# Altium PCB PCB1.PcbDoc
Units mil, origin at the board's own origin, x right, y up, seen from the top; angles counter-clockwise.
Board outline 1574.8 x 1574.8 mil, 2 copper layers (Top Layer, Bottom Layer), stack 38.189 mil thick; 44 components, 35 nets, 170 pads, 9 vias.
Unrouted connection lines stored in the file: 112.
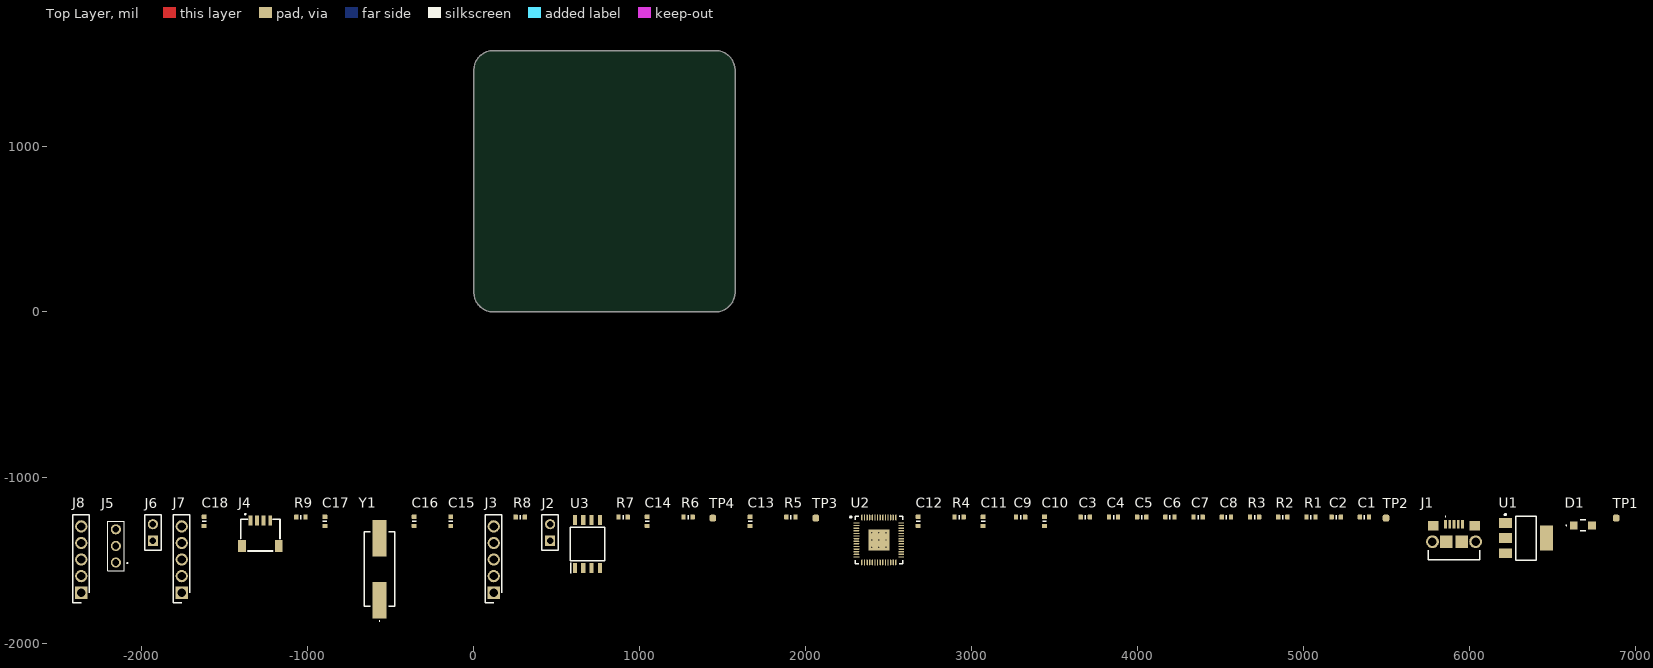
[diagram p0: Top Layer view]
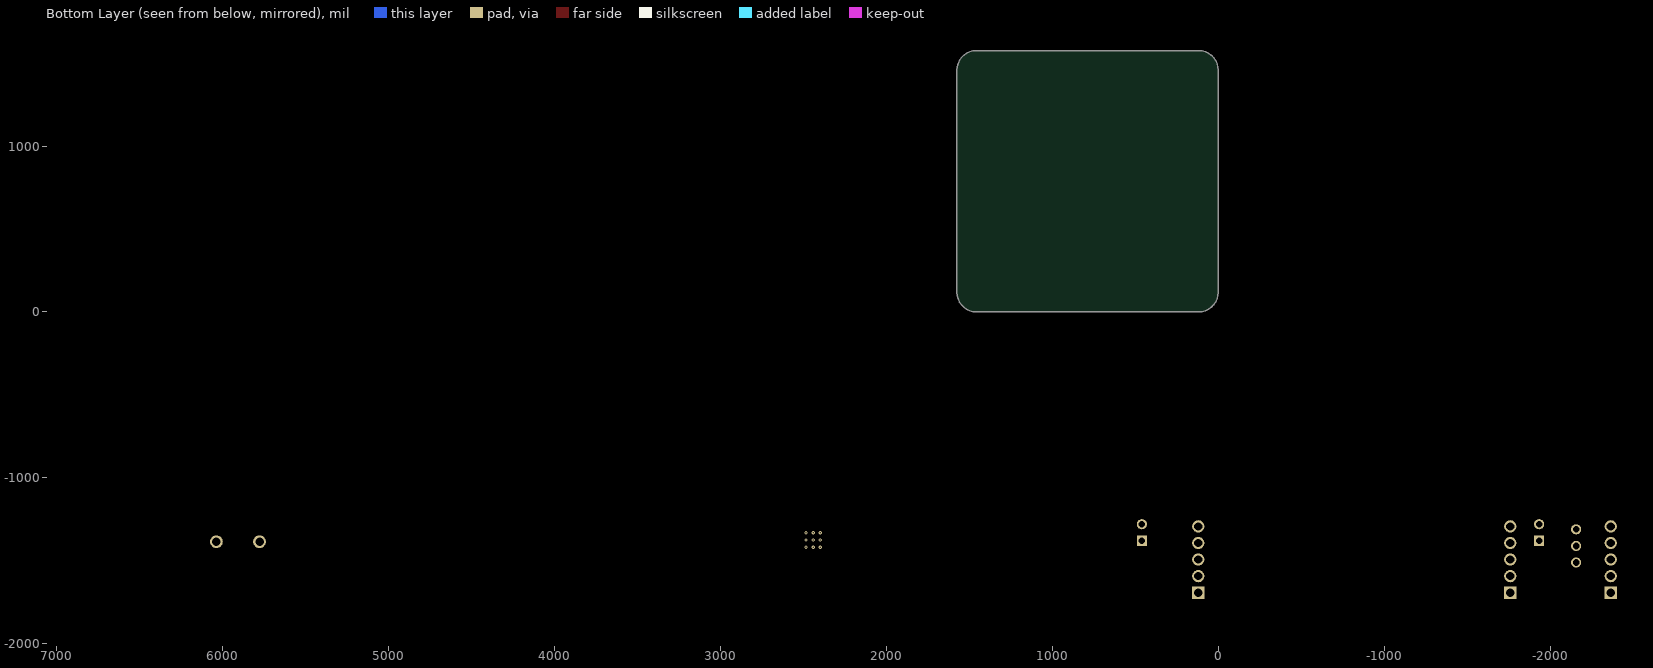
[diagram p1: Bottom Layer view, seen from below]

## Layer stack, top to bottom
Top Solder: solder mask 0.5, Solder Resist, Dk 3.8
Top Layer: signal copper 1.378
Dielectric1: core 35.433, FR-4, Dk 4.5
Bottom Layer: signal copper 1.378
Bottom Solder: solder mask 0.5, Solder Resist, Dk 3.8

## Board outline
119.11,0.6 1457.69,0.6 1478.2,2.39 1498.09,7.72 1516.75,16.42 1533.61,28.23 1548.17,42.79 1559.98,59.65 1568.68,78.31 1574.01,98.2 1575.8,118.71 1575.8,1457.29 1574.01,1477.8 1568.68,1497.69 1559.98,1516.35 1548.17,1533.21 1533.61,1547.77 1516.75,1559.58 1498.09,1568.28 1478.2,1573.61 1457.69,1575.4 119.11,1575.4 98.6,1573.61 78.71,1568.28 60.05,1559.58 43.19,1547.77 28.63,1533.21 16.82,1516.35 8.12,1497.69 2.79,1477.8 1,1457.29 1,118.71 2.79,98.2 8.12,78.31 16.82,59.65 28.63,42.79 43.19,28.23 60.05,16.42 78.71,7.72 98.6,2.39

## Design rules (kind name [scope] priority, off if disabled: settings)
Clearance Clearance_1 [OnMid vs OnMid] p1: gap=10 ignorepadtopadclearanceinfootprint=FALSE except(5: Arc-Arc Arc-Track Arc-Text Track-Track Track-Text SMDPad-SMDPad Text-Text; 12: Arc-SMDPad Track-SMDPad SMDPad-Text; 15: Arc-THPad Track-THPad SMDPad-THPad THPad-Text; 20: THPad-THPad) sourcerule=44 cellrowname=All cellrowtype=0 cellcolname=All cellcoltype=0 innerlayers=TRUE
Clearance Clearance_2 [(ExistsOnLayer('Top Layer') Or ExistsOnLayer('Bottom Layer')) vs (ExistsOnLayer('Top Layer') Or ExistsOnLayer('Bottom Layer'))] p2: gap=10 ignorepadtopadclearanceinfootprint=FALSE except(5: Arc-Arc Arc-Track Arc-Text Track-Track Track-Text SMDPad-SMDPad Text-Text; 12: Arc-SMDPad Track-SMDPad SMDPad-Text; 15: Arc-THPad Track-THPad SMDPad-THPad THPad-Text; 20: THPad-THPad) sourcerule=44 cellrowname=All cellrowtype=0 cellcolname=All cellcoltype=0 outerlayers=TRUE
Clearance [All] p3: gap=10 ignorepadtopadclearanceinfootprint=FALSE ismatrix=TRUE
DiffPairsRouting DifferentialPairsRouting_2 [InDifferentialPairClass('USB2.0')] p1: maxlimit=5 minlimit=5 mostfreqgap=5 toplayer_minwidth=16.75 toplayer_maxwidth=16.75 toplayer_prefwidth=16.75 bottomlayer_minwidth=16.75 bottomlayer_maxwidth=16.75 bottomlayer_prefwidth=16.75 impedanceprofiledriven=TRUE impedanceprofileid={EA6087F4-5ED0-4EBA-825E-8C07D515F3D2} impedanceprofilevalue=90.000000 maxuncoupledlength=500
DiffPairsRouting DifferentialPairsRouting_1 [InDifferentialPairClass('All Differential Pairs')] p2: maxlimit=10 minlimit=5 mostfreqgap=5 toplayer_minwidth=5 toplayer_maxwidth=20 toplayer_prefwidth=15 bottomlayer_minwidth=5 bottomlayer_maxwidth=20 bottomlayer_prefwidth=15 maxuncoupledlength=500
DiffPairsRouting [All] p3: maxlimit=10 minlimit=5 mostfreqgap=5 toplayer_minwidth=5 toplayer_maxwidth=20 toplayer_prefwidth=15 bottomlayer_minwidth=5 bottomlayer_maxwidth=20 bottomlayer_prefwidth=15 maxuncoupledlength=500
HoleSize [All] p1: absolutevalues=TRUE maxlimit=248 minlimit=12 maxpercent=80.000 minpercent=20.000
HoleToHoleClearance [All] p1: gap=20 allowstackedmicrovias=TRUE
MinimumAnnularRing [All] p1: minimumring=12
PasteMaskExpansion [All] p1: expansion=10
PlaneClearance [All] p1: clearance=15
PlaneConnect [All] p1: pad.planeconnectstyle=Relief pad.reliefexpansion=20 pad.reliefentries=4 pad.reliefconductorwidth=10 pad.reliefairgap=10 via.planeconnectstyle=Direct via.reliefexpansion=20 via.reliefentries=4 via.reliefconductorwidth=10 via.reliefairgap=10
PolygonConnect [All] p1: connectstyle=Relief reliefconductorwidth=10 reliefentries=4 polygonreliefangle="90 Angle" conductorbypadedge=TRUE mindistance=15 enablemindistance=FALSE airgapwidth=10
RoomDefinition TOP [InComponentClass('TOP')] p1: confinementstyle=ConfineIn formatcopy=TRUE lockcomponents=FALSE outline -2433,-1894 7021,-1894 7021,-1106 -2433,-1106
RoutingVias RoutingViaStyle_1 [All] p1: holewidth=28 width=50 viastyle="Through Hole" minholewidth=28 minwidth=50 maxholewidth=28 maxwidth=50
RoutingVias [All] p2: holewidth=10 width=20 viastyle="Through Hole" minholewidth=10 minwidth=20 maxholewidth=10 maxwidth=20
SMDNeckDown [All] p1: percent=100.000
SilkToSolderMaskClearance SilkscreenOverComponentPads [IsPad] p1: minsilkscreentomaskgap=10 clearancetoexposedcopper=TRUE
SolderMaskExpansion [All] p1: expansion=10 istentingtop=FALSE
Width MaxMinWidth_1 [InNetClass('REG-PWR')] p1: maxlimit=20 minlimit=10 preferedwidth=10 minimp=50.000000 maximp=50.000000 favimp=50.000000
Width MaxMinWidth_2 [InNetClass('UNREG-PWR')] p2: maxlimit=20 minlimit=10 preferedwidth=10 minimp=50.000000 maximp=50.000000 favimp=50.000000
Width [All] p3: maxlimit=20 minlimit=5 preferedwidth=6 minimp=50.000000 maximp=50.000000 favimp=50.000000
23 further rules are at their usual default settings.

## Classes and differential pairs
net class UNREG-PWR: VBUS VSYS
net class REG-PWR: 1V1_REG 3V3_REG
differential pair class USB2.0: D_USB-D
differential pair D_USB-D: +USB-D_P -USB-D_N

## Components (designator, comment, footprint, x,y, rotation, side; value= is the part's Value field where it differs from the comment)
C1 "Capacitor 10µF +/-20% 10V 0603" CAPC0603(1608)100_L 5368,-1236 r0 top value=10µF
C2 "Capacitor 10µF +/-20% 10V 0603" CAPC0603(1608)100_L 5198,-1236 r0 top value=10µF
C3 "Capacitor 10µF +/-20% 10V 0603" CAPC0603(1608)100_L 3686,-1236 r0 top value=100nF
C4 "Capacitor 10µF +/-20% 10V 0603" CAPC0603(1608)100_L 3856,-1236 r0 top value=100nF
C5 "Capacitor 10µF +/-20% 10V 0603" CAPC0603(1608)100_L 4026,-1236 r0 top value=100nF
C6 "Capacitor 10µF +/-20% 10V 0603" CAPC0603(1608)100_L 4196,-1236 r0 top value=100nF
C7 "Capacitor 10µF +/-20% 10V 0603" CAPC0603(1608)100_L 4366,-1236 r0 top value=100nF
C8 "Capacitor 10µF +/-20% 10V 0603" CAPC0603(1608)100_L 4536,-1236 r0 top value=100nF
C9 "Capacitor 10µF +/-20% 10V 0603" CAPC0603(1608)100_L 3296,-1236 r0 top value=100nF
C10 "Capacitor 10µF +/-20% 10V 0603" CAPC0603(1608)100_L 3440,-1262 r90 top value=100nF
C11 "Capacitor 10µF +/-20% 10V 0603" CAPC0603(1608)100_L 3070,-1262 r90 top value=1uF
C12 "Capacitor 10µF +/-20% 10V 0603" CAPC0603(1608)100_L 2679,-1262 r90 top value=1uF
C13 "Capacitor 10µF +/-20% 10V 0603" CAPC0603(1608)100_L 1666,-1262 r90 top value=1uF
C14 "Capacitor 10µF +/-20% 10V 0603" CAPC0603(1608)100_L 1046,-1262 r90 top value=100nF
C15 "Capacitor 10µF +/-20% 10V 0603" CAPC0603(1608)100_L -138,-1262 r90 top value=100µF
C16 "Capacitor 10µF +/-20% 10V 0603" CAPC0603(1608)100_L -358,-1262 r90 top value=30pF
C17 "Capacitor 10µF +/-20% 10V 0603" CAPC0603(1608)100_L -896,-1262 r90 top value=30pF
C18 "Capacitor 10µF +/-20% 10V 0603" CAPC0603(1608)100_L -1624,-1262 r90 top value=100µF
D1 "PMEG2010ER,115" PMEG2010ER115 6685,-1286 r0 top
J1 "10118193-0001LF" 101181930001LF 5908,-1373 r0 top
J2 "TSW-102-26-G-S" SMTC-TSW-102-26-XX-S 461,-1379 r90 top
J3 "2212S-05SG-85" RHDR5W74P0X254_1X5_1320X250X850P 121,-1692 r90 top
J4 "SM04B-SRSS-TB_LF__SN_" SM04B-SRSS-TB(LFSN) -1403,-1441 r0 top
J5 "TSW-103-26-G-S" TSW-103-XX-YY-S -2156,-1510 r90 top
J6 "TSW-102-26-G-S" SMTC-TSW-102-26-XX-S -1933,-1379 r90 top
J7 "2212S-05SG-85" RHDR5W74P0X254_1X5_1320X250X850P -1759,-1692 r90 top
J8 "2212S-05SG-85" RHDR5W74P0X254_1X5_1320X250X850P -2365,-1692 r90 top
R1 "Resistor 120R +/-5 % 0603 0.1 W" RESC0603(1608)_L 5046,-1236 r0 top value=180R
R2 "Resistor 120R +/-5 % 0603 0.1 W" RESC0603(1608)_L 4876,-1236 r0 top value=300R
R3 "Resistor 120R +/-5 % 0603 0.1 W" RESC0603(1608)_L 4706,-1236 r0 top value=200R
R4 "Resistor 120R +/-5 % 0603 0.1 W" RESC0603(1608)_L 2925,-1236 r0 top value=1R
R5 "Resistor 120R +/-5 % 0603 0.1 W" RESC0603(1608)_L 1912,-1236 r0 top value=27R
R6 "Resistor 120R +/-5 % 0603 0.1 W" RESC0603(1608)_L 1292,-1236 r0 top value=27R
R7 "Resistor 120R +/-5 % 0603 0.1 W" RESC0603(1608)_L 901,-1236 r0 top value=DNF
R8 "Resistor 120R +/-5 % 0603 0.1 W" RESC0603(1608)_L 281,-1236 r0 top value=1k
R9 "Resistor 120R +/-5 % 0603 0.1 W" RESC0603(1608)_L -1041,-1236 r0 top value=1k
TP1 "TestPoint" TestPoint-Footprint-1 6885,-1242 r0 top
TP2 "TestPoint" TestPoint-Footprint-1 5498,-1242 r90 top
TP3 "TestPoint" TestPoint-Footprint-1 2062,-1242 r90 top
TP4 "TestPoint" TestPoint-Footprint-1 1441,-1242 r90 top
U1 "NCP1117ISTAT3G" SOT230P700X180-4N 6341,-1363 r0 top
U2 "RP2040CT" QFN40P700X700X90_HS-57N 2442,-1374 r0 top
U3 "S25FL128LAGMFI010" SOIC127P800X216-8N 686,-1398 r90 top
Y1 "ABLS-12.000MHZ-B4-T" ABLS -567,-1550 r90 top

## Footprints (in the part's own frame and the unit in brackets; to place one, negate y for a bottom-side part, rotate by r counter-clockwise, add the part's x,y. Pads: shape width x height; smd on the part's side, far side on the other; paste and mask are expansions set on the pad)
101181930001LF [mm]
  rect 0.4x1.35 smd: 1(-1.3,2.38) 2(-0.65,2.38) 3(0,2.38) 4(0.65,2.38) 5(1.3,2.38)
  round 1.95 hole 1.3: MH1(-3.3,-0.295) MH2(3.3,-0.295)
  rect 1.6x1.4 smd: MP1(-3.2,2.155) MP2(3.2,2.155)
  rect 1.9x1.9 smd: MP3(-1.2,-0.295) MP4(1.2,-0.295)
  silkscreen extent -3.93,-3.06 3.93,3.6
ABLS [mm]
  rect 5.6x2.1 smd: 1(-4.75,0) 2(4.75,0)
  silkscreen extent -8,-2.35 5.7,2.35, body extent -6.35,-2.35 6.35,2.35, height 4.2
CAPC0603(1608)100_L [mm] "Chip Capacitor, Body 1.6x0.8mm, Height 1.0mm, IPC High Density"
  rrect25% 0.66x0.76 smd: 1(-0.7,0) 2(0.7,0)
  silkscreen extent 0,-0.3 0,0.3, body extent -0.8,-0.4 0.8,0.4, height 0.95
PMEG2010ER115 [mm]
  rect 1.2x1.2 smd: 1(-1.4,0) 2(1.4,0)
  silkscreen extent -2.6,-0.85 0.4,0.85, body extent -1.75,-1 1.75,1, height 1.07
QFN40P700X700X90_HS-57N [mm] "QFN, 56-Leads, Body 7.00x7.00mm, Pitch 0.40mm, Thermal Pad 3.20x3.20mm, IPC Medium Density"
  oval 0.875x0.2 smd: 1(-3.437,2.6) 2(-3.437,2.2) 3(-3.437,1.8) 4(-3.437,1.4) 5(-3.437,1) 6(-3.437,0.6) 7(-3.437,0.2) 8(-3.437,-0.2) 9(-3.437,-0.6) 10(-3.437,-1) 11(-3.437,-1.4) 12(-3.437,-1.8) 13(-3.437,-2.2) 14(-3.437,-2.6) 29(3.438,-2.6) 30(3.438,-2.2) 31(3.438,-1.8) 32(3.438,-1.4) 33(3.438,-1) 34(3.438,-0.6) 35(3.438,-0.2) 36(3.438,0.2) 37(3.438,0.6) 38(3.438,1) 39(3.438,1.4) 40(3.438,1.8) 41(3.438,2.2) 42(3.438,2.6)
  oval 0.2x0.875 smd: 15(-2.6,-3.438) 16(-2.2,-3.438) 17(-1.8,-3.438) 18(-1.4,-3.438) 19(-1,-3.438) 20(-0.6,-3.438) 21(-0.2,-3.438) 22(0.2,-3.438) 23(0.6,-3.438) 24(1,-3.438) 25(1.4,-3.438) 26(1.8,-3.438) 27(2.2,-3.438) 28(2.6,-3.438) 43(2.6,3.437) 44(2.2,3.437) 45(1.8,3.437) 46(1.4,3.437) 47(1,3.437) 48(0.6,3.437) 49(0.2,3.437) 50(-0.2,3.437) 51(-0.6,3.437) 52(-1,3.437) 53(-1.4,3.437) 54(-1.8,3.437) 55(-2.2,3.437) 56(-2.6,3.437)
  rect 3.2x3.2 smd: 57(0,0)
  silkscreen extent -4.42,-3.65 3.65,3.65, body extent -3.5,-3.5 3.5,3.5, height 0.9
RESC0603(1608)_L [mm] "Chip Resistor, Body 1.6x0.8mm, IPC High Density"
  rrect25% 0.66x0.76 smd: 1(-0.7,0) 2(0.7,0)
  silkscreen extent 0,-0.3 0,0.3, body extent -0.8,-0.4 0.8,0.4, height 0.45
RHDR5W74P0X254_1X5_1320X250X850P [mm]
  rect 1.875x1.875 hole 1.25: 1(0,0)
  round 1.875 hole 1.25: 2(2.54,0) 3(5.08,0) 4(7.62,0) 5(10.16,0)
  silkscreen extent -1.52,-1.25 11.93,1.33, body extent -1.52,-1.25 11.68,1.25, height 8.5
SM04B-SRSS-TB(LFSN) [mm]
  rect 0.6x1.55 smd: 1(1.5,4.661) 2(2.5,4.661) 3(3.5,4.661) 4(4.5,4.661)
  rect 1.2x1.8 smd: 5(0.2,0.786) 6(5.8,0.786)
  silkscreen extent 0,0 6,5.7, body extent 0,0.28 6,5.23, height 2.97
SMTC-TSW-102-26-XX-S [mm] ".025 SQ Post Terminal Strip Assembly, 1x2 Pins, Vertical, 2.54mm Pitch, Male"
  rect 1.55x1.55 hole 1.02: 1(0,0)
  round 1.55 hole 1.02: 2(2.54,0)
  silkscreen extent -1.46,-1.27 4,1.27, body extent -1.4,-1.27 3.81,1.27, height 8.38
SOIC127P800X216-8N [mm]
  rect 1.55x0.65 smd: 1(-3.675,1.905) 2(-3.675,0.635) 3(-3.675,-0.635) 4(-3.675,-1.905) 5(3.675,-1.905) 6(3.675,-0.635) 7(3.675,0.635) 8(3.675,1.905)
  silkscreen extent -4.45,-2.64 2.55,2.64
SOT230P700X180-4N [mm] "SOT223, 4-Leads, Body 6.50x7.00mm (avg), Pitch 2.30mm, IPC Medium Density"
  rect 2x1.5 smd: 1(-3.15,2.3) 2(-3.15,0) 3(-3.15,-2.3)
  rect 2x3.8 smd: 4(3.15,0)
  silkscreen extent -3.27,-3.35 1.55,3.72, body extent -1.85,-3.35 1.85,3.35, height 1.8
TestPoint-Footprint-1 [mil]
  rrect50% 40x40 smd: 1(0,0)
TSW-103-XX-YY-S [mm]
  round 1.55 hole 1.02: 1(0,0) 2(2.54,0) 3(5.08,0)
  silkscreen extent -1.27,-1.8 6.35,1.27, body extent -1.34,-1.46 6.41,1.08, height 5.21

## Part data
C1 C2 C3 C4 C5 C6 C7 C8 C9 C10 C11 C12 C13 C14 C15 C16 C17 C18: library part CMP-001-00075-4, "Chip Capacitor, 10µF +/-20%, 10V, 0603, Thickness 1 mm", Case/Package=0603, Max Operating Temperature=85°C, Min Operating Temperature=-55°C, Tolerance=10%, Voltage Rating=10V, Mounting Technology=SMT, Pins=2
D1: "Schottky Diode", Manufacturer_Name=Nexperia, Mouser Part Number=771-PMEG2010ER115, Arrow Part Number=PMEG2010ER,115, Arrow Price/Stock=https://www.arrow.com/en/products/pmeg2010er115/nexperia?region=nac, Datasheet Link=https://assets.nexperia.com/documents/data-sheet/PMEG2010ER.pdf, Height=1.1mm, Manufacturer_Part_Number=PMEG2010ER,115, Mouser Price/Stock=https://www.mouser.co.uk/ProductDetail/Nexperia/PMEG2010ER115?qs=LMSg3oBIm%2FjLN28PGE8ULg%3D%3D
J1: library part CMP-004-000000-1, "Micro USB 2.0, Input Output Connectors, B TYPE RECEPTACLE", Manufacturer_Name="Amphenol Communications Solutions", Datasheet Link=https://cdn.amphenol-cs.com/media/wysiwyg/files/drawing/10118193.pdf, Design Item ID=10118193-0001LF, Geometry.Height=3.3mm, Manufacturer_Part_Number=10118193-0001LF, Source=10118193-0001LF.SchLib
J2 J6: library part CMP-1024-00327-1, "0.025\" SQ Post Header, Through-hole, Vertical, -55 to 125 degC, 2.54 mm Pitch, 2-Pin, Male, RoHS", Manufacturer=Samtec, Temperature Range="-55 to 125 degC", ComponentLink1Description="Manufacturer URL", ComponentLink1URL=http://www.samtec.com, ComponentLink2Description=Datasheet, ComponentLink2URL=http://www.samtec.com/documents/webfiles/pdf/TSW_TH.PDF, ComponentLink3Description="Package Specification", ComponentLink3URL=http://www.samtec.com/documents/webfiles/cpdf/TSW-XXX-XX-XXX-X-XX-XXX-MKT.pdf, DatasheetVersion=F-214, Mounting Technology=Through-hole, Orientation=Vertical, PackageDescription=".025[0.64] SQ. Post Terminal Strip Assembly", PackageReference=TSW-102-26-XX-S, PackageVersion="DM, 8/1988", PartNumber=TSW-102-26-G-S, Pitch="2.54 mm", RoHS=True
J3 J7 J8: "Connector", Manufacturer_Name="Multicomp Pro", Datasheet Link=https://componentsearchengine.com/Datasheets/2/2212S-05SG-85.pdf, Height=8.5mm, Manufacturer_Part_Number=2212S-05SG-85
J4: "Connector", Arrow Part Number=SM04B-SRSS-TB(LF)(SN), Manufacturer_Name="JST (JAPAN SOLDERLESS TERMINALS)", Arrow Price/Stock=https://www.arrow.com/en/products/sm04b-srss-tb-lf-sn/jst-manufacturing?region=europe, Datasheet Link=http://www.jst-mfg.com/product/pdf/eng/eSH.pdf, Manufacturer_Part_Number=SM04B-SRSS-TB(LF)(SN)
J5: "Connector", Manufacturer_Name=SAMTEC, Datasheet Link=http://suddendocs.samtec.com/prints/tsw-xxx-xx-xxx-x-xx-xxx-mkt.pdf, Manufacturer_Part_Number=TSW-103-26-G-S
R1 R2 R3 R4 R5 R6 R7 R8 R9: library part CMP-009-00176-3, "Chip Resistor, 120 Ohms, +/-5 %, 0.1 W, -55 to 155 degC, 0603", Case/Package=0603, Max Operating Temperature=155°C, Min Operating Temperature=-55°C, Power=100mW, Tolerance=5%, Pins=2
TP1 TP2 TP3 TP4: library part CMP-00030-00001-2, "Test point for circuit testing."
U1: library part CMP-019-00050-5, "Positive Adjustable 1 Output 1 A Linear Voltage Regulator IC - SOT-223", Case/Package=SOT223, Dropout Voltage=1.07V, Max Operating Temperature=125°C, Max Power Dissipation=20W, Max Supply Voltage=20V, Min Supply Voltage=2.4V, Nominal Supply Current=1A, Mounting Technology=SMD, Output Current=1A, Pins=4, RoHS Compliant=Yes
U2: library part CMP-020-00023-1, "RASPBERRY-PI RP2040CT", Case/Package=QFN-56, Clock Frequency=12MHz, Frequency=133MHz, Mounting Technology=SMD, Pins=56
U3: library part CMP-007-000000-1, "CYPRESS SEMICONDUCTOR - S25FL128LAGMFI010 - FLASH MEMORY, 128MBIT, 133MHZ, SOIC-8", Manufacturer_Name=Infineon, Datasheet Link=http://www.cypress.com/file/316171/download, Design Item ID=S25FL128LAGMFI010, Geometry.Height=2.16mm, Manufacturer_Part_Number=S25FL128LAGMFI010, Source=S25FL128LAGMFI010.SchLib
Y1: "Crystal or Oscillator", Manufacturer_Name=ABRACON, Mouser Part Number=815-ABLS-12.0M-T, Arrow Part Number=ABLS-12.000MHZ-B4-T, Arrow Price/Stock=https://www.arrow.com/en/products/abls-12.000mhz-b4-t/abracon?region=europe, Datasheet Link=https://abracon.com/Resonators/abls.pdf, Manufacturer_Part_Number=ABLS-12.000MHZ-B4-T, Mouser Price/Stock=https://www.mouser.co.uk/ProductDetail/ABRACON/ABLS-12.000MHZ-B4-T?qs=yTU0IcKoRlGSQ8ooxPPVnQ%3D%3D

## Via types
v1: diameter 19.68, hole 7.87, Top Layer to Bottom Layer, 9 vias

## Nets (pads, with @x,y where several pads share a name; then routed paths per layer and width w, separated by ;. In a path a pad name is that pad's centre, name@x,y a point inside that pad or via, vN(x,y) a via of type N, cw(c..) or ccw(c..) an arc to the next point about the centre after c; other vN are vias at no path point)
1V1_REG: C9.1 C10.1 C12.1 U2.23 U2.45 U2.50
3V3_REG: C2.1 C3.1 C4.1 C5.1 C6.1 C7.1 C8.1 C11.1 C14.1 C15.1 J3.1 R1.1 R3.1 R7.2 U1.2 U1.4 U2.1 U2.10 U2.22 U2.33 U2.42 U2.44 U2.48 U2.49 U3.8
ADC_AVDD: C13.1 R4.2 U2.43
ADC_VREF: R3.2 R4.1
CRSF_RX: J4.2 U2.7
CRSF_TX: J4.1 U2.6
GND: C1.2 C2.2 C3.2 C4.2 C5.2 C6.2 C7.2 C8.2 C9.2 C10.2 C11.2 C12.2 C13.2 C14.2 C15.2 C16.2 C17.2 C18.2 J1.5 J1.MH1 J1.MH2 J1.MP1 J1.MP2 J1.MP3 J1.MP4 J2.2 J3.2 J4.3 J5.2 J6.2 J7.3 J8.2 J8.3 J8.4 R2.2 U2.19 U2.57 U3.4
  other v1: 2398.69,-1417.31 2442,-1417.31 2485.31,-1417.31 2398.69,-1374 2442,-1374 2485.31,-1374 2398.69,-1330.69 2442,-1330.69 2485.31,-1330.69
GPIO18: J7.1 U2.29
GPIO19: J7.2 U2.30
GPIO20: J7.4 U2.31
GPIO21: J7.5 U2.32
GPIO26: J8.1 U2.38
GPIO27: J8.5 U2.39
HC12_RX: J3.4 U2.3
HC12_SET: J3.5 U2.17
HC12_TX: J3.3 U2.2
NetC17_1: C17.1 R9.1 Y1.2
NetR1_2: R1.2 R2.1 U1.1
QSPI_CSn: R7.1 R8.2 U2.56 U3.1
QSPI_SCLK: U2.52 U3.6
QSPI_SD0: U2.53 U3.5
QSPI_SD1: U2.55 U3.2
QSPI_SD2: U2.54 U3.3
QSPI_SD3: U2.51 U3.7
SWCLK: J5.1 U2.24
SWD: J5.3 U2.25
USB-D_N: J1.2 R6.1 TP4.1
USB-D_NX: R6.2 U2.46
USB-D_P: J1.3 R5.1 TP3.1
USB-D_PX: R5.2 U2.47
USB_BOOTn: J2.1 R8.1
VBUS: D1.2 J1.1 TP1.1
VSYS: C1.1 C18.1 D1.1 J4.4 J6.1 TP2.1 U1.3
XIN: C16.1 U2.20 Y1.1
XOUT: R9.2 U2.21
pads on no net: J1.4 J4.5 J4.6 U2.4 U2.5 U2.8 U2.9 U2.11 U2.12 U2.13 U2.14 U2.15 U2.16 U2.18 U2.26 U2.27 U2.28 U2.34 U2.35 U2.36 U2.37 U2.40 U2.41